# Altium PCB iceWerx_dev_carrier.PcbDoc (part 1 of 2)
Units mil, origin at the board's own origin, x right, y up, seen from the top; angles counter-clockwise.
Board outline 4750 x 3625 mil, 2 copper layers (Top Layer, Bottom Layer); 142 components, 162 nets, 603 pads, 259 vias.
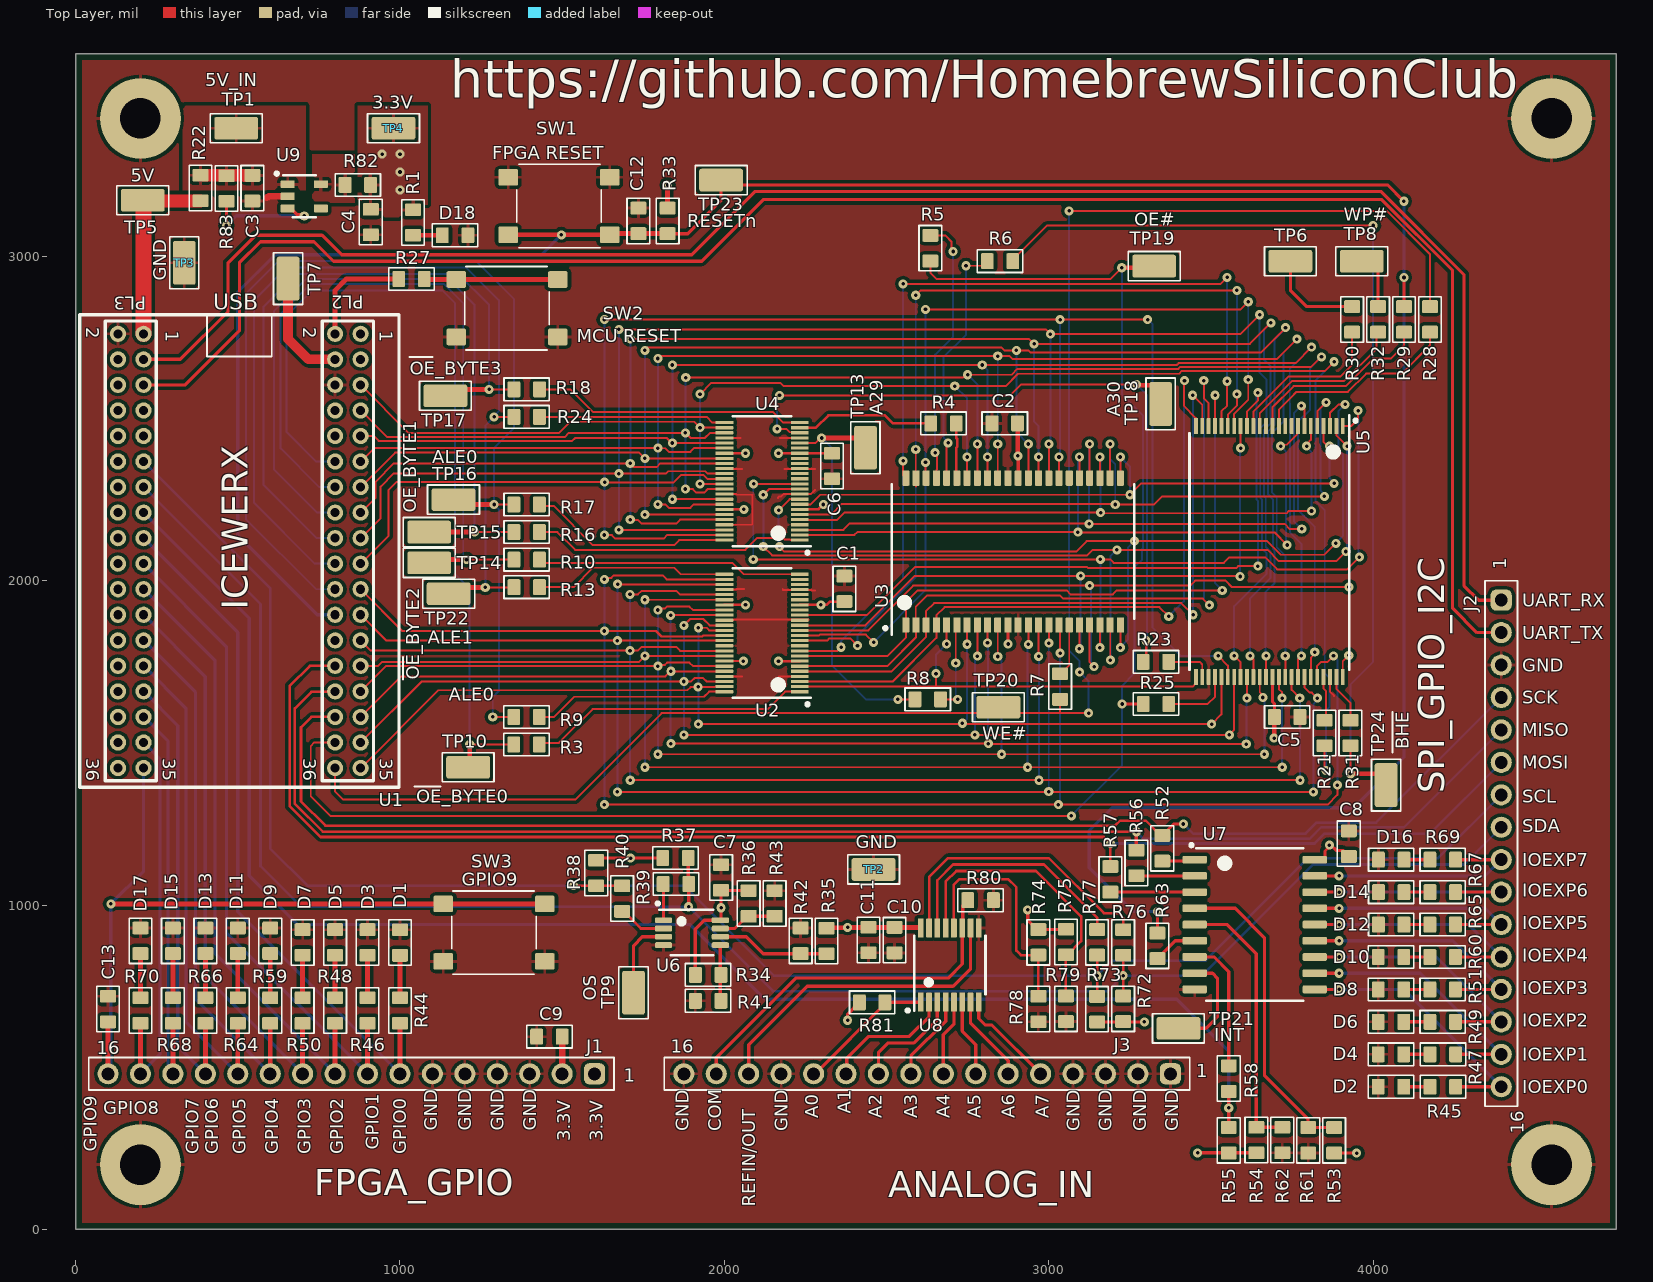
[diagram p0: Top Layer view]
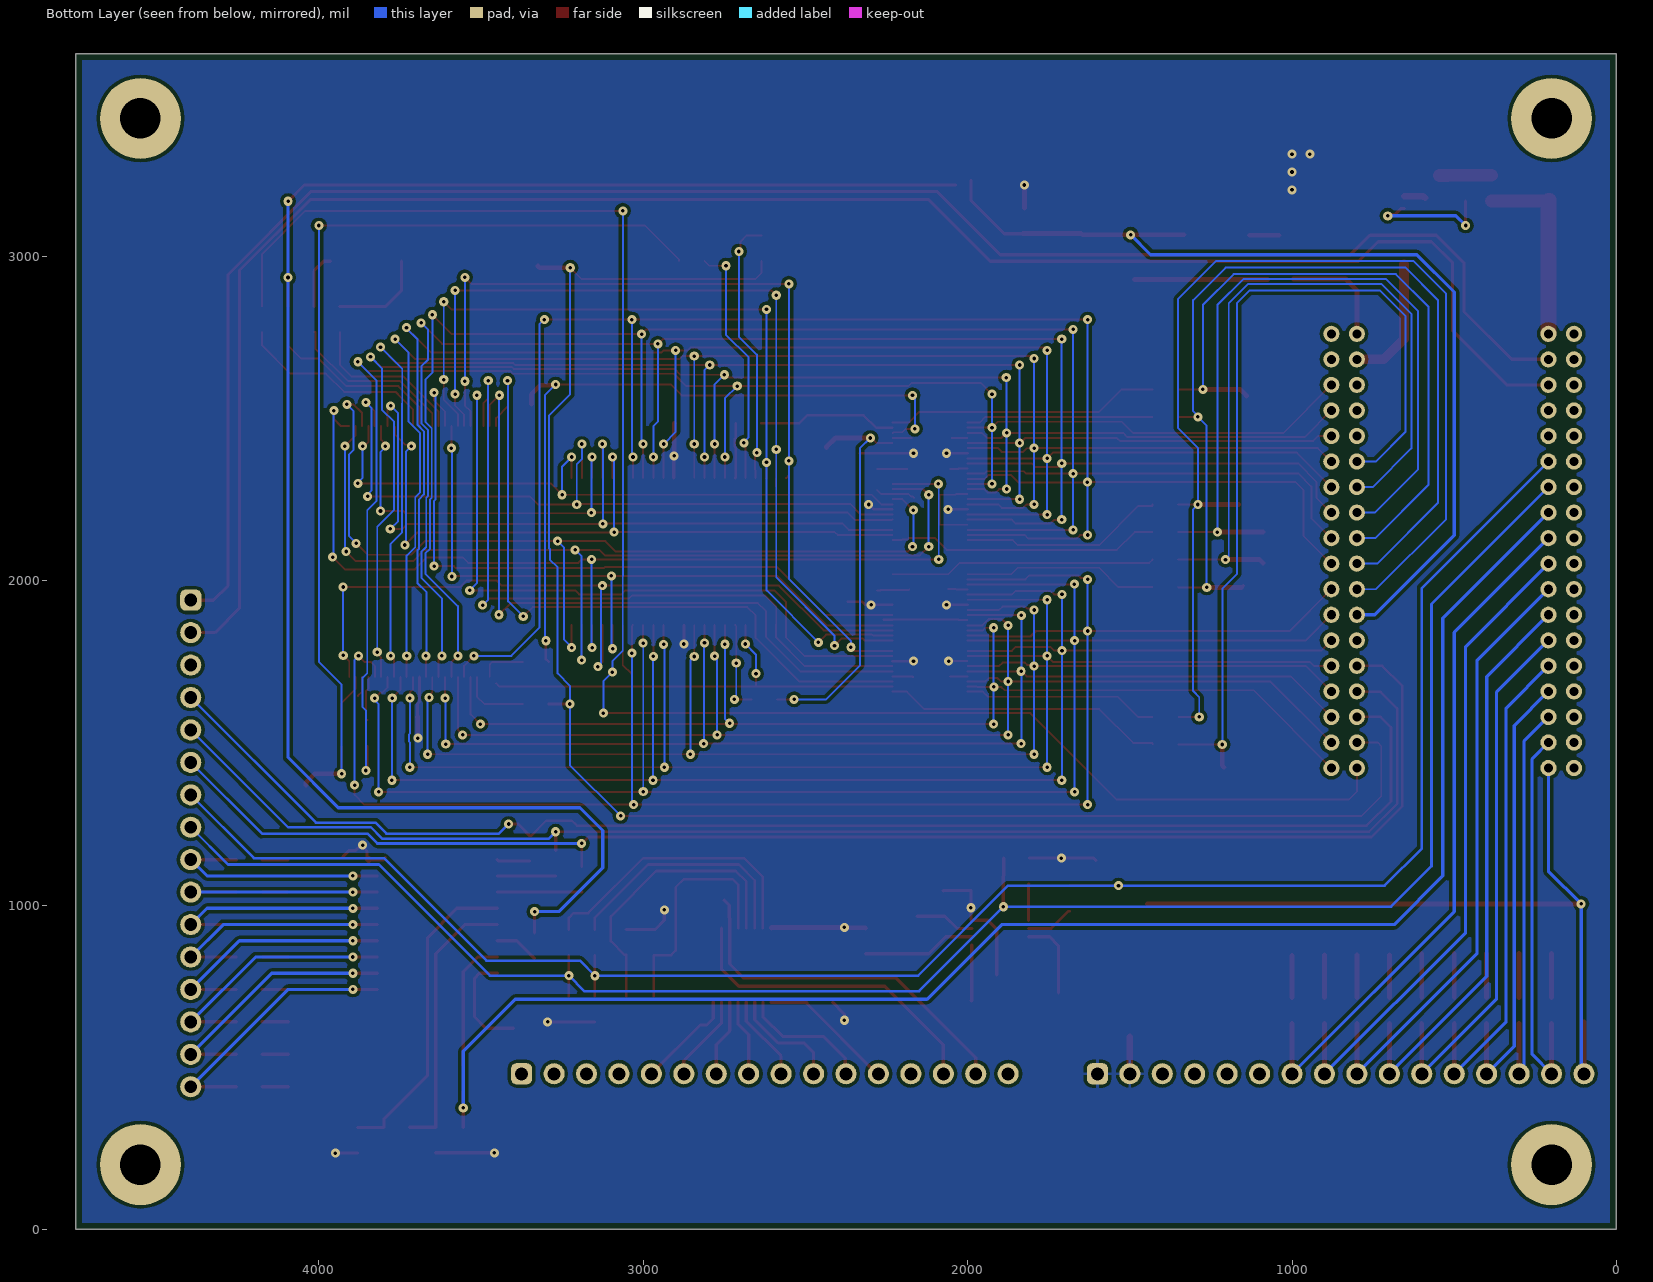
[diagram p1: Bottom Layer view, seen from below]

## Layer stack, top to bottom
Top Solder: solder mask 0.4, Solder Resist, Dk 3.5
Top Layer: signal copper 1.4
Dielectric 1: dielectric 12.6, FR-4, Dk 4.8
Bottom Layer: signal copper 1.4
Bottom Solder: solder mask 0.4, Solder Resist, Dk 3.5

## Board outline
0,0 0,3625 4750,3625 4750,0

## Design rules (kind name [scope] priority, off if disabled: settings)
AcuteAngle [All] p1: minimum=6.00000000000000E+0001 checktracksonly=FALSE
BoardOutlineClearance BoardOutlineClearance_SILK [OnLayer('Top Overlay')] p1: gap=20 ignorepadtopadclearanceinfootprint=FALSE except(0: Arc-SplitContinuation Track-SplitContinuation SMDPad-SplitContinuation THPad-SplitContinuation Via-SplitContinuation Fill-SplitContinuation Poly-SplitContinuation Region-SplitContinuation Text-SplitContinuation; 5: Arc-OutlineEdge Track-OutlineEdge Text-OutlineEdge)
BoardOutlineClearance [All] p2: gap=20 ignorepadtopadclearanceinfootprint=FALSE except(0: Arc-SplitContinuation Track-SplitContinuation SMDPad-SplitContinuation THPad-SplitContinuation Via-SplitContinuation Fill-SplitContinuation Poly-SplitContinuation Region-SplitContinuation Text-SplitContinuation)
Clearance [All] p1: gap=10 ignorepadtopadclearanceinfootprint=FALSE except(0: Arc-Hole Track-Hole SMDPad-Hole THPad-Hole Via-Hole Fill-Hole Poly-Hole Region-Hole Text-Hole; 5: SMDPad-SMDPad; 6: Arc-Arc Arc-Track Arc-SMDPad Track-Track Track-SMDPad)
HoleSize [All] p1: absolutevalues=TRUE maxlimit=250 minlimit=10 maxpercent=80.000 minpercent=20.000
HoleToHoleClearance [All] p1: gap=15 allowstackedmicrovias=TRUE
MinimumAnnularRing [All] p1: minimumring=8.5
MinimumSolderMaskSliver [All] p1: minsoldermaskwidth=3
PolygonConnect [All] p1: thpad.connectstyle=Relief thpad.reliefconductorwidth=10 thpad.reliefentries=4 thpad.polygonreliefangle="90 Angle" thpad.airgapwidth=10 smdpad.connectstyle=Relief smdpad.reliefconductorwidth=10 smdpad.reliefentries=4 smdpad.polygonreliefangle="90 Angle" smdpad.airgapwidth=10 via.connectstyle=Direct via.reliefconductorwidth=10 via.reliefentries=4 via.polygonreliefangle="90 Angle" via.airgapwidth=10
RoomDefinition peripherals [InComponentClass('peripherals')] p1: confinementstyle=ConfineIn formatcopy=TRUE lockcomponents=FALSE outline 27.66,417.5 27.66,595.99 52.5,595.99 52.5,761.87 152.5,761.87 152.5,972.5 1088.99,972.5 1088.99,1056.08 1557.5,1056.08 1557.5,1181.24 1766.87,1181.24 1766.87,1192.5 3222.5,1192.5 3222.5,1212.5 3302.5,1212.5 3302.5,1257.5 3877.5,1257.5 3877.5,1271.87 4332.5,1271.87 4332.5,2064.33 4481,2064.33 4481,279 3927.5,279 3927.5,192.5 3507.5,192.5 3507.5,417.5
RoomDefinition icewerks [InComponentClass('icewerks')] p2: confinementstyle=ConfineIn formatcopy=TRUE lockcomponents=FALSE outline -2.4,1348.5 -2.4,2895.25 114.72,2895.25 114.72,3230.28 337.5,3230.28 337.5,3293.13 402.5,3293.13 402.5,3452.5 1072.5,3452.5 1072.5,3296.08 1691.01,3296.08 1691.01,3292.5 2082.5,3292.5 2082.5,3107.5 2682.5,3107.5 2682.5,3042.5 4057.5,3042.5 4057.5,2888.21 4222.89,2888.21 4222.89,2723.21 4097.5,2723.21 4097.5,1277.5 2552.5,1277.5 2552.5,1052.5 2367.5,1052.5 2367.5,1348.5
RoutingVias [All] p1: holewidth=20 width=45 viastyle="Through Hole" minholewidth=10 minwidth=30 maxholewidth=100 maxwidth=200
SilkToSilkClearance [All] p1: silktosilkclearance=0
SilkToSolderMaskClearance [IsPad] p1: minsilkscreentomaskgap=0 clearancetoexposedcopper=TRUE
SolderMaskExpansion [All] p1: expansion=4
UnRoutedNet [All] p1: checkbadconnections=TRUE
Width [All] p1: maxlimit=100 minlimit=6 preferedwidth=15 minimp=50.000000 maximp=50.000000 favimp=50.000000
24 further rules are at their usual default settings.

## Classes and differential pairs
net class IO[15..0]: IO0 IO1 IO2 IO3 IO4 IO5 IO6 IO7 IO8 IO9 IO10 IO11 IO12 IO13 IO14 IO15
net class FPGA_GPIO[9..0]: FPGA_GPIO0 FPGA_GPIO1 FPGA_GPIO2 FPGA_GPIO3 FPGA_GPIO4 FPGA_GPIO5 FPGA_GPIO6 FPGA_GPIO7 FPGA_GPIO8 FPGA_GPIO9
net class A[31..0]: A0 A1 A2 A3 A4 A5 A6 A7 A8 A9 A10 A11 A12 A13 A14 A15 A16 A17 A18 A19 A20 A21 A22 A23 A24 A25 A26 A27 A28 A29 A30 A31
component class peripherals: C7 C8 C9 C10 C11 C13 D1 D2 D3 D4 D5 D6 D7 D8 D9 D10 D11 D12 D13 D14 D15 D16 D17 J1 J2 J3 R34 R35 R36 R37 R38 R39 R40 R41 R42 R43 R44 R45 R46 R47 R48 R49 R50 R51 R52 R53 R54 R55 R56 R57 R58 R59 R60 R61 R62 R63 R64 R65 R66 R67 R68 R69 R70 R72 R73 R74 R75 R76 R77 R78 R79 R80 R81 SW3 TP9 TP21 U6 U7 U8
component class icewerks: C1 C2 C3 C4 C5 C6 C12 D18 R1 R3 R4 R5 R6 R7 R8 R9 R10 R13 R16 R17 R18 R21 R22 R23 R24 R25 R27 R28 R29 R30 R31 R32 R33 R82 R83 SW1 SW2 TP1 TP2 TP3 TP4 TP5 TP6 TP7 TP8 TP10 TP13 TP14 TP15 TP16 TP17 TP18 TP19 TP20 TP22 TP23 TP24 U1 U2 U3 U4 U5 U9

## Components (designator, comment, footprint, x,y, rotation, side; value= is the part's Value field where it differs from the comment)
C1 "Cap_NP" 0805 2370,1975 r270 top
C2 "Cap_NP" 0805 2864.37,2485 r0 top
C3 "Cap_NP" 0805 545,3210 r90 top
C4 "Cap_NP" 0805 910,3105.63 r90 top
C5 "Cap_NP" 0805 3735,1580 r180 top
C6 "Cap_NP" 0805 2332,2353.76 r90 top
C7 "Cap_NP" 0805 1990,1085 r270 top
C8 "Cap_NP" 0805 3925,1189.37 r270 top
C9 "Cap_NP" 0805 1460.63,594.37 r0 top
C10 "Cap_NP" 0805 2524.54,891.89 r90 top
C11 "Cap_NP" 0805 2444.54,892.52 r90 top
C12 "Cap_NP" 0805 1735,3109.37 r270 top
C13 "Cap_NP" 0805 100,679.37 r270 top
D1 "LED" 0805 1000,884.37 r90 top
D2 "LED" 0805 4055,440 r180 top
D3 "LED" 0805 900,885 r90 top
D4 "LED" 0805 4055,540 r180 top
D5 "LED" 0805 800,885 r90 top
D6 "LED" 0805 4055,640 r180 top
D7 "LED" 0805 700,885 r90 top
D8 "LED" 0805 4055,740 r180 top
D9 "LED" 0805 600,890 r90 top
D10 "LED" 0805 4055,840 r180 top
D11 "LED" 0805 500,890 r90 top
D12 "LED" 0805 4055.63,940 r180 top
D13 "LED" 0805 400,890 r90 top
D14 "LED" 0805 4055.63,1040 r180 top
D15 "LED" 0805 300,890 r90 top
D16 "LED" 0805 4055.63,1140 r180 top
D17 "LED" 0805 200,890 r90 top
D18 "LED" 0805 1170,3065 r0 top
J1 "16X1 CONN" "0.100 16X1 HEADER" 850,480 r90 top
J2 "16X1 CONN" "0.100 16X1 HEADER" 4395,1190 r180 top
J3 "16X1 CONN" "0.100 16X1 HEADER" 2625,480 r90 top
R1 "Res" 0805 1040.13,3104.37 r90 top
R3 "Res" 0805 1390,1495 r0 top
R4 "Res" 0805 2675.63,2485 r180 top
R5 "Res" 0805 2635,3025 r270 top
R6 "Res" 0805 2850,2985 r0 top
R7 "Res" 0805 3035,1673.54 r270 top
R8 "Res" 0805 2626.99,1634.17 r180 top
R9 "Res" 0805 1390,1580 r0 top
R10 "Res" 0805 1390.63,2065 r0 top
R13 "Res" 0805 1390.63,1980 r0 top
R16 "Res" 0805 1390.63,2150 r0 top
R17 "Res" 0805 1390.63,2235 r0 top
R18 "Res" 0805 1390.63,2590 r0 top
R21 "Res" 0805 3850,1530.63 r90 top
R22 "Res" 0805 385,3210.63 r90 top
R23 "Res" 0805 3330.63,1750 r180 top
R24 "Res" 0805 1390.63,2505 r0 top
R25 "Res" 0805 3330.63,1620 r180 top
R27 "Res" 0805 1035.62,2930 r0 top
R28 "Res" 0805 4175.39,2805.71 r90 top
R29 "Res" 0805 4095.39,2805.71 r90 top
R30 "Res" 0805 3935.39,2805.71 r270 top
R31 "Res" 0805 3930,1530.63 r270 top
R32 "Res" 0805 4015.39,2805.71 r90 top
R33 "Res" 0805 1825,3109.37 r90 top
R34 "Res" 0805 1950,785 r0 top
R35 "Res" 0805 2315,889.37 r270 top
R36 "Res" 0805 2075,1005 r270 top
R37 "Res" 0805 1849.37,1145 r0 top
R38 "Res" 0805 1605,1098.74 r270 top
R39 "Res" 0805 1850.63,1065 r0 top
R40 "Res" 0805 1685,1020 r90 top
R41 "Res" 0805 1950,705 r180 top
R42 "Res" 0805 2235,890 r90 top
R43 "Res" 0805 2155,1005 r90 top
R44 "Res" 0805 1000,675 r270 top
R45 "Res" 0805 4215,440 r0 top
R46 "Res" 0805 900,675 r270 top
R47 "Res" 0805 4215,540 r0 top
R48 "Res" 0805 800,675 r270 top
R49 "Res" 0805 4214.37,640 r0 top
R50 "Res" 0805 700,675 r270 top
R51 "Res" 0805 4214.37,740 r0 top
R52 "Res" 0805 3350,1175 r90 top
R53 "Res" 0805 3880,275 r90 top
R54 "Res" 0805 3640,275.63 r90 top
R55 "Res" 0805 3555,275 r90 top
R56 "Res" 0805 3270,1130 r90 top
R57 "Res" 0805 3190,1079.37 r90 top
R58 "Res" 0805 3555,465 r270 top
R59 "Res" 0805 600,675 r270 top
R60 "Res" 0805 4214.37,840 r0 top
R61 "Res" 0805 3800,275 r270 top
R62 "Res" 0805 3720,275.63 r270 top
R63 "Res" 0805 3335,874.37 r90 top
R64 "Res" 0805 500,675 r270 top
R65 "Res" 0805 4214.37,940 r0 top
R66 "Res" 0805 400,675 r270 top
R67 "Res" 0805 4214.37,1040 r0 top
R68 "Res" 0805 300,675 r270 top
R69 "Res" 0805 4214.37,1140 r0 top
R70 "Res" 0805 200,675 r270 top
R72 "Res" 0805 3229.52,680.31 r90 top
R73 "Res" 0805 3148.98,679.06 r90 top
R74 "Res" 0805 2968.06,885.32 r270 top
R75 "Res" 0805 3053.06,885.94 r270 top
R76 "Res" 0805 3229.52,884.68 r270 top
R77 "Res" 0805 3148.98,885.32 r270 top
R78 "Res" 0805 2968.06,679.69 r270 top
R79 "Res" 0805 3053.06,680.32 r270 top
R80 "Res" 0805 2790,1015 r0 top
R81 "Res" 0805 2455.63,700 r0 top
R82 "Res" 0805 870,3220 r0 top
R83 "Res" 0805 465,3209.37 r90 top
SW1 "PUSHBUTTON SW" "PTS645SM43SMTR92 LFS" 1490,3155 r180 top
SW2 "PUSHBUTTON SW" "PTS645SM43SMTR92 LFS" 1330,2840 r0 top
SW3 "PUSHBUTTON SW" "PTS645SM43SMTR92 LFS" 1290,915 r0 top
TP1 "TP" KEYSTONE_5012 495,3395 r0 top
TP2 "TP" KEYSTONE_5012 2460,1110 r0 top
TP3 "TP" KEYSTONE_5012 335,2980 r270 top
TP4 "TP" KEYSTONE_5012 980,3395 r0 top
TP5 "TP" KEYSTONE_5012 207.22,3172.78 r180 top
TP6 "TP" KEYSTONE_5012 3745,2985 r0 top
TP7 "TP" KEYSTONE_5012 655,2931.43 r90 top
TP8 "TP" KEYSTONE_5012 3965,2985 r0 top
TP9 "TP" KEYSTONE_5012 1720,730 r90 top
TP10 "TP" KEYSTONE_5012 1210,1425 r180 top
TP13 "TP" KEYSTONE_5012 2435,2410 r270 top
TP14 "TP" KEYSTONE_5012 1090,2055 r180 top
TP15 "TP" KEYSTONE_5012 1090,2150 r180 top
TP16 "TP" KEYSTONE_5012 1165,2250 r180 top
TP17 "TP" KEYSTONE_5012 1140,2570 r0 top
TP18 "TP" KEYSTONE_5012 3345,2545 r270 top
TP19 "TP" KEYSTONE_5012 3325,2970 r180 top
TP20 "TP" KEYSTONE_5012 2845,1610 r180 top
TP21 "TP" KEYSTONE_5012 3400,620 r0 top
TP22 "TP" KEYSTONE_5012 1150,1960 r180 top
TP23 "TP" KEYSTONE_5012 1990,3235 r180 top
TP24 "TP" KEYSTONE_5012 4040,1370 r90 top
U1 "iCE40 HX8K" "iCE40 HX8K FPGA MODULE" 504.72,2091.85 r180 top locked
U2 "74LVC16373ADGVJ" "NEXPERIA TSSOP48 SOT480-1" 2116.14,1838.9 r180 top locked
U3 "CY62147GE30-45ZSXI" "CYPRESS Z44 44-TSOP II" 2890,2090 r90 top locked
U4 "74LVC16373ADGVJ" "NEXPERIA TSSOP48 SOT480-1" 2116.14,2306.38 r180 top locked
U5 "S29AL008J70TFI020" "CYPRRESS 48-TSOP" 3680,2090 r270 top locked
U6 "PCT2075DP,118" "NXP TSSOP-8 (SOT505-1)" 1900,915 r0 top
U7 "MCP23S08T-E/SO" "MICROCHIP 18-SOIC" 3635,940 r0 top locked
U8 "ADS7830IPWR" "TI PW0016A (16TSSOP)" 2695,815 r90 top
U9 "TLV73333PDBVR" "TI DBV0005A (SOT23-5)" 705,3185 r0 top

## Footprints (in the part's own frame and the unit in brackets; to place one, negate y for a bottom-side part, rotate by r counter-clockwise, add the part's x,y. Pads: shape width x height; smd on the part's side, far side on the other; paste and mask are expansions set on the pad)
"0.100 16X1 HEADER" [mil] "HEADER"
  rrect50% 65x65 hole 40: 1(0,-750)
  round 65 hole 40: 2(0,-650) 3(0,-550) 4(0,-450) 5(0,-350) 6(0,-250) 7(0,-150) 8(0,-50) 9(0,50) 10(0,150) 11(0,250) 12(0,350) 13(0,450) 14(0,550) 15(0,650) 16(0,750)
  silkscreen extent -50,-810 50,810, body extent -50,-810 50,810, height 335
0805 [mm]
  rrect20% 1x1.25 smd: 1(-1,0) 2(1,0)
  silkscreen extent -1.78,-0.89 1.78,0.89, body extent -1.4,-0.63 1,0.63, height 2
"CYPRESS Z44 44-TSOP II" [mm] "44-TSOP"
  rrect20% 1.2x0.55 smd mask+0.076: 1(-5.75,8.4) 2(-5.75,7.6) 3(-5.75,6.8) 4(-5.75,6) 5(-5.75,5.2) 6(-5.75,4.4) 7(-5.75,3.6) 8(-5.75,2.8) 9(-5.75,2) 10(-5.75,1.2) 11(-5.75,0.4) 12(-5.75,-0.4) 13(-5.75,-1.2) 14(-5.75,-2) 15(-5.75,-2.8) 16(-5.75,-3.6) 17(-5.75,-4.4) 18(-5.75,-5.2) 19(-5.75,-6) 20(-5.75,-6.8) 21(-5.75,-7.6) 22(-5.75,-8.4) 23(5.75,-8.4) 24(5.75,-7.6) 25(5.75,-6.8) 26(5.75,-6) 27(5.75,-5.2) 28(5.75,-4.4) 29(5.75,-3.6) 30(5.75,-2.8) 31(5.75,-2) 32(5.75,-1.2) 33(5.75,-0.4) 34(5.75,0.4) 35(5.75,1.2) 36(5.75,2) 37(5.75,2.8) 38(5.75,3.6) 39(5.75,4.4) 40(5.75,5.2) 41(5.75,6) 42(5.75,6.8) 43(5.75,7.6) 44(5.75,8.4)
  silkscreen extent -6.5,-9.5 5.25,10.12, body extent -5.92,-9.25 5.92,9.25, height 1.19
"CYPRRESS 48-TSOP" [mm] "48-TSOP"
  rrect20% 1.25x0.3 smd mask+0.05: 1(-9.825,5.75) 2(-9.825,5.25) 3(-9.825,4.75) 4(-9.825,4.25) 5(-9.825,3.75) 6(-9.825,3.25) 7(-9.825,2.75) 8(-9.825,2.25) 9(-9.825,1.75) 10(-9.825,1.25) 11(-9.825,0.75) 12(-9.825,0.25) 13(-9.825,-0.25) 14(-9.825,-0.75) 15(-9.825,-1.25) 16(-9.825,-1.75) 17(-9.825,-2.25) 18(-9.825,-2.75) 19(-9.825,-3.25) 20(-9.825,-3.75) 21(-9.825,-4.25) 22(-9.825,-4.75) 23(-9.825,-5.25) 24(-9.825,-5.75) 25(9.825,-5.75) 26(9.825,-5.25) 27(9.825,-4.75) 28(9.825,-4.25) 29(9.825,-3.75) 30(9.825,-3.25) 31(9.825,-2.75) 32(9.825,-2.25) 33(9.825,-1.75) 34(9.825,-1.25) 35(9.825,-0.75) 36(9.825,-0.25) 37(9.825,0.25) 38(9.825,0.75) 39(9.825,1.25) 40(9.825,1.75) 41(9.825,2.25) 42(9.825,2.75) 43(9.825,3.25) 44(9.825,3.75) 45(9.825,4.25) 46(9.825,4.75) 47(9.825,5.25) 48(9.825,5.75)
  silkscreen extent -10.68,-6.25 9.25,6.88, body extent -10,-6 10,6, height 1.2
"iCE40 HX8K FPGA MODULE" [mm] "iCE40 HX8K FPGA MODULE"
  round 1.27 hole 0.711: PL2_1(-9.5,-17) PL2_2(-7.5,-17) PL2_3(-9.5,-15) PL2_4(-7.5,-15) PL2_5(-9.5,-13) PL2_6(-7.5,-13) PL2_7(-9.5,-11) PL2_8(-7.5,-11) PL2_9(-9.5,-9) PL2_10(-7.5,-9) PL2_11(-9.5,-7) PL2_12(-7.5,-7) PL2_13(-9.5,-5) PL2_14(-7.5,-5) PL2_15(-9.5,-3) PL2_16(-7.5,-3) PL2_17(-9.5,-1) PL2_18(-7.5,-1) PL2_19(-9.5,1) PL2_20(-7.5,1) PL2_21(-9.5,3) PL2_22(-7.5,3) PL2_23(-9.5,5) PL2_24(-7.5,5) PL2_25(-9.5,7) PL2_26(-7.5,7) PL2_27(-9.5,9) PL2_28(-7.5,9) PL2_29(-9.5,11) PL2_30(-7.5,11) PL2_31(-9.5,13) PL2_32(-7.5,13) PL2_33(-9.5,15) PL2_34(-7.5,15) PL2_35(-9.5,17) PL2_36(-7.5,17) PL3_1(7.5,-17) PL3_2(9.5,-17) PL3_3(7.5,-15) PL3_4(9.5,-15) PL3_5(7.5,-13) PL3_6(9.5,-13) PL3_7(7.5,-11) PL3_8(9.5,-11) PL3_9(7.5,-9) PL3_10(9.5,-9) PL3_11(7.5,-7) PL3_12(9.5,-7) PL3_13(7.5,-5) PL3_14(9.5,-5) PL3_15(7.5,-3) PL3_16(9.5,-3) PL3_17(7.5,-1) PL3_18(9.5,-1) PL3_19(7.5,1) PL3_20(9.5,1) PL3_21(7.5,3) PL3_22(9.5,3) PL3_23(7.5,5) PL3_24(9.5,5) PL3_25(7.5,7) PL3_26(9.5,7) PL3_27(7.5,9) PL3_28(9.5,9) PL3_29(7.5,11) PL3_30(9.5,11) PL3_31(7.5,13) PL3_32(9.5,13) PL3_33(7.5,15) PL3_34(9.5,15) PL3_35(7.5,17) PL3_36(9.5,17)
  silkscreen extent -12.5,-18.5 12.5,18.5, body extent -10.5,-18.15 10.5,18.15, height 6.35
KEYSTONE_5012 [mm] "TEST POINT PC"
  rrect20% 3.43x1.78 smd: 1(0,0)
  silkscreen extent -2.03,-1.14 2.03,1.14, body extent -1.28,-0.52 1.28,0.48, height 1.5
"MICROCHIP 18-SOIC" [mm] "SOIC, 18-Leads, Body 11.55x7.50mm, Pitch 1.27mm, IPC Medium Density"
  rrect30% 1.9x0.6 smd: 1(-4.7,5.08) 2(-4.7,3.81) 3(-4.7,2.54) 4(-4.7,1.27) 5(-4.7,0) 6(-4.7,-1.27) 7(-4.7,-2.54) 8(-4.7,-3.81) 9(-4.7,-5.08) 10(4.7,-5.08) 11(4.7,-3.81) 12(4.7,-2.54) 13(4.7,-1.27) 14(4.7,0) 15(4.7,1.27) 16(4.7,2.54) 17(4.7,3.81) 18(4.7,5.08)
  silkscreen extent -5.08,-5.97 3.81,6.35, body extent -5.15,-5.8 5.15,5.8, height 2.65
"NEXPERIA TSSOP48 SOT480-1" [mm] "TSSOP48"
  rrect20% 1.4x0.246 smd mask+0.025: 1(-2.95,4.6) 2(-2.95,4.2) 3(-2.95,3.8) 4(-2.95,3.4) 5(-2.95,3) 6(-2.95,2.6) 7(-2.95,2.2) 8(-2.95,1.8) 9(-2.95,1.4) 10(-2.95,1) 11(-2.95,0.6) 12(-2.95,0.2) 13(-2.95,-0.2) 14(-2.95,-0.6) 15(-2.95,-1) 16(-2.95,-1.4) 17(-2.95,-1.8) 18(-2.95,-2.2) 19(-2.95,-2.6) 20(-2.95,-3) 21(-2.95,-3.4) 22(-2.95,-3.8) 23(-2.95,-4.2) 24(-2.95,-4.6) 25(2.95,-4.6) 26(2.95,-4.2) 27(2.95,-3.8) 28(2.95,-3.4) 29(2.95,-3) 30(2.95,-2.6) 31(2.95,-2.2) 32(2.95,-1.8) 33(2.95,-1.4) 34(2.95,-1) 35(2.95,-0.6) 36(2.95,-0.2) 37(2.95,0.2) 38(2.95,0.6) 39(2.95,1) 40(2.95,1.4) 41(2.95,1.8) 42(2.95,2.2) 43(2.95,2.6) 44(2.95,3) 45(2.95,3.4) 46(2.95,3.8) 47(2.95,4.2) 48(2.95,4.6)
  silkscreen extent -3.81,-5.08 2.29,5.71, body extent -3.2,-4.9 3.2,4.9, height 1.1
"NXP TSSOP-8 (SOT505-1)" [mm]
  rrect50% 1.35x0.45 smd mask+0.05: 1(-2.225,0.975) 2(-2.225,0.325) 3(-2.225,-0.325) 4(-2.225,-0.975) 5(2.225,-0.975) 6(2.225,-0.325) 7(2.225,0.325) 8(2.225,0.975)
  silkscreen extent -2.79,-1.78 1.65,2.41, body extent -2.45,-1.55 2.45,1.55, height 1.1
"PTS645SM43SMTR92 LFS" [mm] "Tactile Switch SPST-NO Top Actuated Surface Mount"
  rrect20% 1.55x1.3 smd: 1(-3.975,2.25) 2(3.975,2.25) 3(-3.975,-2.25) 4(3.975,-2.25)
  silkscreen extent -3.3,-3.27 3.3,3.27, body extent -4.51,-3.01 4.49,2.99, height 4.3
"TI DBV0005A (SOT23-5)" [mm]
  rrect20% 1.1x0.6 smd: 1(-1.3,0.95) 2(-1.3,0) 3(-1.3,-0.95) 4(1.3,-0.95) 5(1.3,0.95)
  silkscreen extent -2.28,-1.65 0.89,1.9, body extent -1.5,-1.53 1.5,1.53, height 1.1
"TI PW0016A (16TSSOP)" [mm] "16-TSSOP"
  rrect25% 1.5x0.45 smd mask+0.05: 1(-2.9,2.275) 2(-2.9,1.625) 3(-2.9,0.975) 4(-2.9,0.325) 5(-2.9,-0.325) 6(-2.9,-0.975) 7(-2.9,-1.625) 8(-2.9,-2.275) 9(2.9,-2.275) 10(2.9,-1.625) 11(2.9,-0.975) 12(2.9,-0.325) 13(2.9,0.325) 14(2.9,0.975) 15(2.9,1.625) 16(2.9,2.275)
  silkscreen extent -3.68,-2.79 2.29,3.43, body extent -3.2,-2.55 3.2,2.55, height 1.2

## Part data
C1 C2 C5 C6 C7 C8 C9 C11 C12 C13: "Capacitor", Capacitance=0.1uF, Manufacturer=KEMET, Manufacturer PN=C0805C104M4VACTU, Voltage=16V
C3 C4 C10: "Capacitor", Capacitance=1uF, Manufacturer="Taiyo Yuden", Manufacturer PN=EMK212BJ105MD-T, Voltage=16V
D1 D2 D4 D6 D7 D8 D13 D18: Color=GREEN, Manufacturer=Lite-On, Manufacturer PN=LTST-C171KGKT, Vf=2V
D3 D9 D14 D15 D16: Color=YELLOW, Manufacturer=Lite-On, Manufacturer PN=LTST-C171KSKT, Vf=2V
D5 D10 D11 D12 D17: Color=RED, Manufacturer=Lite-On, Manufacturer PN=LTST-C171KRKT, Vf=2V
J1 J2 J3: Manufacturer=Sullins, Manufacturer PN=PPTC161LFBN-RC
R1 R37 R38 R44 R45 R46 R47 R48 R49 R50 R51 R59 R60 R64 R65 R66 R67 R68 R69 R70 R72 R73: "Resistor", Manufacturer="Stackpole Electronics Inc", Manufacturer PN=RMCF0805JT1K00, Power Rating=1/8W, Resistance=1k, Tolerance=5%
R3 R4 R5 R6 R7 R8 R9 R10 R13 R16 R17 R18 R21 R22 R23 R24 R25 R27 R28 R29 R30 R31 R32 R34 R35 R36 R39 R40 R41 R42 R43 R52 R53 R54 R56 R57 R58 R61 R62 R63 R74 R75 R76 R77 R78 R79 R80 R81 R82 R83: "Resistor", Manufacturer="Stackpole Electronics Inc", Manufacturer PN=RMCF0805ZT0R00, Power Rating=1/10W, Resistance=0, Tolerance=Jumper
R33: "Resistor", Manufacturer="Stackpole Electronics Inc", Manufacturer PN=RMCF0805JT10K0, Power Rating=1/8W, Resistance=10k, Tolerance=5%
R55: "Resistor", Manufacturer="Stackpole Electronics Inc", Manufacturer PN=RMCF0805JT10K0, Power Rating=1/8W, Resistance=10K, Tolerance=5%
SW1 SW2 SW3: library part SWITCH_PB, Manufacturer=C&K, Manufacturer PN="PTS645SM43SMTR92 LFS"
TP1 TP2 TP3 TP4 TP5 TP6 TP7 TP8 TP9 TP10 TP13 TP14 TP15 TP16 TP17 TP18 TP19 TP20 TP21 TP22 TP23 TP24: Manufacturer=Keystone, Manufacturer PN=5015
U1: library part "iCE40 HX8K FPGA MODULE", Manufacturer=Samtec, Manufacturer PN=SQW-118-01-L-D
U2 U4: "D-Type Transparent Latch 2 Channel 8:8 IC Tri-State 48-TSSOP", Manufacturer=Nexperia, Manufacturer PN=74LVC16373ADGVJ
U3: "SRAM - Asynchronous Memory IC 4Mb (256K x 16) Parallel 45ns 44-TSOP II", Manufacturer=Cypress, Manufacturer PN=CY62147GE30-45ZSXI
U5: "FLASH - NOR Memory IC 8Mb (1M x 8, 512K x 16) Parallel  70ns 48-TSOP", Manufacturer=Cypress, Manufacturer PN=S29AL008J70TFI020
U6: "Temperature Sensor Digital, Local -55亱C ~ 125亱C 11 b 8-TSSOP", Manufacturer=NXP, Manufacturer PN=PCT2075DP,118
U7: Manufacturer=Microchip, Manufacturer PN=MCP23S08T-E/SO
U8 U9: Manufacturer="Texas Instruments"
  U8: Manufacturer PN=ADS7830IPWR
  U9: Manufacturer PN=TLV73333PDBVR

## Free pads (board coordinates)
  round 250 hole 125: MH(200,200) MH(200,3425) MH(4550,200) MH(4550,3425)

## Via types
v1: diameter 28, hole 11, Top Layer to Bottom Layer, tented top, 259 vias

## Nets (pads, with @x,y where several pads share a name; then routed paths per layer and width w, separated by ;. In a path a pad name is that pad's centre, name@x,y a point inside that pad or via, vN(x,y) a via of type N, cw(c..) or ccw(c..) an arc to the next point about the centre after c; other vN are vias at no path point)
3V3: C1.2 C2.2 C4.2 C5.2 C6.2 C7.2 C8.2 C9.2 C10.2 C11.2 J1.1 J1.2 R1.2 R33.2 R34.1 R35.1 R36.1 R37.1 R38.1 R53.1 R54.1 R55.1 R72.1 R73.1 R74.1 R75.1 R81.1 R82.2 TP4.1 U2.7 U2.18 U2.31 U2.42 U3.11 U3.33 U4.7 U4.18 U4.31 U4.42 U5.37 U6.8 U7.18 U8.16 | length 3025.5
  Top Layer w6: U2.42@2000,1752.28 v1(2058.54,1752.28)
  Top Layer w8: U2.31@2000,1925.51 v1(2065.28,1925.51) ; U4.31@2000,2392.99 v1(2065.28,2392.99) ; U4.42@2000.12,2219.88 2059.88,2219.88 v1(2060,2220) ; v1(2167.01,1752.28) U2.7@2232.28,1752.28 ; v1(2167.01,2392.99) U4.18@2232.28,2392.99 C6.2@2332,2393.13 ; U2.18@2232.28,1925.51 v1(2297.56,1925.51) 2315.51,1925.51 2325.63,1935.63 C1.2@2370,1935.63 ; U4.7@2232.28,2219.76 2233.03,2220.51 2290.51,2220.51 v1(2305,2235)
  Top Layer w10: R38.1@1605,1138.11 1611.89,1145 v1(1710.94,1145) R37.1@1810,1145 ; R34.1@1910.63,785 1910.63,925.63 1938.39,953.39 U6.8@1987.6,953.39 1990,955.79 v1(1990,991.75) C7.2@1990,1045.63 1990.63,1045 2074.37,1045 R36.1@2075,1044.37 ; v1(2380,645) 2380,663.74 R81.1@2416.26,700 ; U3.11@2874.25,1863.62 2874.25,1805.75 v1(2875,1805) ; v1(2905,2385) 2905.75,2384.25 U3.33@2905.75,2316.38 ; v1(2935,985) 2935,952.83 2963.14,924.69 R74.1@2968.06,924.69 R75.1@3053.06,924.69 ; R73.1@3148.98,639.69 3295,639.69 v1(3295,639.84) v1@3295,640 ; v1(3458.74,236.26) R54.1@3640,236.26 ; U5.37@3689.84,1703.19 3689.84,1626.86 3695.63,1621.07 C5.2@3695.63,1580 ; U7.18@3795,1146.81 3801.81,1140 U7.18@3820.04,1140 3844.87,1140 3851.68,1146.81 3851.68,1166.81 3865,1180.13 v1(3865,1185) 3869.87,1185 3886.34,1168.53 3906.47,1168.53 C8.2@3925,1150 ; R53.1@3880,235.63 v1(3949.37,235.63)
  Top Layer w15: R33.2@1825,3148.74 v1(1825,3220) ; R35.1@2315,928.74 2316.26,930 2378.74,930 v1(2380,931.26) C10.2@2524.54,931.26 2604.07,931.26 2605.43,929.9 U8.16@2605.43,929.17 ; C2.2@2903.74,2485 2904.37,2484.37 2904.37,2385.63 v1(2905,2385) ; v1(3695,1515) 3695.31,1515.31 3695.31,1579.68 C5.2@3695.63,1580
  Top Layer w20: J1.2@1500,480 C9.2@1500,594.37 ; U7.18@3845.63,1140 U7.18@3847.44,1141.81
  other v1: 1000,3205 1000,3260 945,3315 1000,3315
3V3_ICE: TP7.1 U1.PL2_4 | length 400.9
  Top Layer w30: TP7.1@655,2975 655,2745 717.6,2682.4 U1.PL2_4@800,2682.4
A0: U2.2 U3.5 U5.25 | length 1429
  Top Layer w6: U2.2@2232.28,1673.54 2652.54,1673.54 ; v1(2652.54,1713.54) 2652.54,1673.54 ; v1(2685,1805) 2685.14,1805.14 2685.14,1863.48 U3.5@2685.28,1863.62 ; U5.25@3453.62,1683.19 3443.98,1673.54 2652.54,1673.54
  Bottom Layer w6: v1(2652.54,1713.54) 2652.54,1772.54 v1(2685,1805)
A1: U2.3 U3.4 U5.24 | length 2189.2
  Top Layer w6: U2.3@2232.28,1689.29 2519.29,1689.29 2653.78,1823.78 U3.4@2653.78,1863.62 2653.78,1893.78 2678.93,1918.93 3341.07,1918.93 v1(3370,1890) ; v1(3418.62,2616.81) 3416.31,2614.5 3416.31,2538.73 3453.62,2501.42 U5.24@3453.62,2476.81
  Bottom Layer w6: v1(3370,1890) 3416.31,1936.31 3416.31,2614.5 v1(3418.62,2616.81)
A2: U2.5 U3.3 U5.23 | length 2146.3
  Top Layer w6: U2.5@2232.28,1720.79 2515.79,1720.79 2622.28,1827.28 U3.3@2622.28,1863.62 2622.28,1906.83 2646.52,1931.06 3408.94,1931.06 v1(3445,1895) ; v1(3443.31,2571.81) 3473.31,2541.81 U5.23@3473.31,2476.81
  Bottom Layer w6: v1(3443.31,2571.81) 3445,2570.12 v1(3445,1895)
A3: U2.6 U3.2 U5.22 | length 2267.1
  Top Layer w6: U2.6@2232.28,1736.54 2501.54,1736.54 2590.79,1825.79 U3.2@2590.79,1863.62 2590,1864.41 2590,1920.2 2624.8,1955 3034.42,1955 3044.42,1945 3475,1945 v1(3495,1925) ; v1(3477.99,2616.81) 3477.99,2562.01 3492.99,2547.01 U5.22@3492.99,2476.81
  Bottom Layer w6: v1(3477.99,2616.81) 3477.99,1942.01 v1(3495,1925)
A4: U2.8 U3.1 U5.21 | length 2166
  Top Layer w6: U2.8@2232.28,1768.03 2503,1768 2559.29,1824.29 U3.1@2559.29,1863.62 2559.29,1932.92 2596.37,1970 3055,1970 3067,1958 3198,1958 3210,1970 v1(3535,1970) ; U5.21@3512.68,2476.81 v1(3512.68,2571.81)
  Bottom Layer w6: v1(3512.68,2571.81) 3512.68,1992.32 v1(3535,1970)
A5: U2.9 U3.44 U5.20 | length 2861
  Top Layer w6: U2.9@2232.28,1783.78 2348.78,1783.78 v1(2360,1795) ; v1(2550.89,2369.58) 2550.89,2324.78 U3.44@2559.29,2316.38 ; v1(2550.89,2915) 3530,2915 v1(3550,2935) ; U5.20@3532.36,2476.81 3532.36,2522.36 3550,2540 v1(3550,2615)
  Bottom Layer w6: v1(2360,1795) 2360,1815 2550.89,2005.89 v1(2550.89,2369.58) v1(2550.89,2915) ; v1(3550,2615) v1(3550,2935)
A6: U2.11 U3.43 U5.19 | length 2913.1
  Top Layer w6: U2.11@2232.28,1815.28 2317.09,1815.28 2323.82,1822 2388.43,1822 v1(2410.43,1800) ; v1(2590,2405) 2590,2289.76 2590.79,2289.76 U3.43@2590.79,2316.38 ; v1(2590,2880) 2605,2895 v1(3580,2895) ; U5.19@3552.05,2476.81 3552.05,2512.05 3580,2540 v1(3580,2575)
  Bottom Layer w6: v1(2410.43,1800) 2410.43,1830.43 2590,2010 v1(2590,2405) v1(2590,2880) ; v1(3580,2575) v1(3580,2895)
A7: U2.12 U3.42 U5.18 | length 2791.6
  Top Layer w6: U2.12@2232.28,1831.02 2291.02,1831.02 2294,1834 2436,1834 v1(2460,1810) ; v1(2620,2365) 2620,2314.09 U3.42@2622.28,2316.38 ; v1(2620,2836.51) 3591.51,2836.51 v1(3615,2860) ; U5.18@3571.73,2476.81 3571.73,2514.76 3615,2558.03 v1(3615,2620)
  Bottom Layer w6: v1(2460,1810) 2620,1970 v1(2620,2365) v1(2620,2836.51) ; v1(3615,2620) v1(3615,2860)
A8: U3.27 U4.2 U5.8 | length 2228
  Top Layer w6: U4.2@2232.28,2141.02 2401.02,2141.02 2410,2150 v1(3090,2150) 3092,2148 3251.83,2148 3252.83,2149 3696,2149 v1(3735,2110) ; U3.27@3094.72,2316.38 v1(3094.72,2381.38) ; v1(3715,2415) 3719.21,2419.21 3733.84,2419.21 3765.68,2451.04 3765.68,2473.91 U5.8@3768.58,2476.81
  Bottom Layer w6: v1(3090,2150) 3090,2376.65 v1(3094.72,2381.38) ; v1(3715,2415) 3731,2399 3731,2114 v1(3735,2110)
A9: U3.26 U4.3 U5.7 | length 2379.6
  Top Layer w6: U4.3@2232.28,2156.77 2366.77,2156.77 2387,2177 3122.64,2177 v1(3124.64,2175) 3727.11,2175 3742.11,2160 v1(3780,2160) ; U3.26@3126.22,2316.38 v1(3126.22,2421.38) ; v1(3778.86,2538.96) 3788.27,2529.55 U5.7@3788.27,2476.81
  Bottom Layer w6: v1(3124.64,2175) 3124.64,2419.8 v1(3126.22,2421.38) ; v1(3778.86,2538.96) 3756,2516.1 3756,2184 v1(3780,2160)
A10: U3.25 U4.5 U5.6 | length 2113.5
  Top Layer w6: U4.5@2232.28,2188.27 2234.03,2186.52 2346.52,2186.52 2370,2210 v1(3160,2210) 3162,2208 3733.37,2208 3740.37,2215 v1(3810,2215) ; U3.25@3157.72,2316.38 v1(3157.72,2381.38) ; U5.6@3807.95,2476.81 3807.95,2433.91 v1@3798.51,2424.47 ; v1@3798.51,2424.47 3798.51,2418.51 v1(3795,2415) 3795,2420.95 v1@3798.51,2424.47
  Bottom Layer w6: v1(3157.72,2381.38) 3160,2379.09 v1(3160,2210) ; v1(3795,2415) 3795,2412.47 3810,2397.47 v1(3810,2215)
A11: U3.24 U4.6 U5.5 | length 2327
  Top Layer w6: U4.6@2232.28,2204.02 2329.02,2204.02 2362,2237 3203,2237 v1(3205,2235) 3325,2235 3350,2260 v1(3850,2260) ; U3.24@3189.21,2316.38 v1(3189.21,2421.38) ; U5.5@3827.64,2476.81 3828.82,2477.99 3828.82,2523.82 v1(3855,2550)
  Bottom Layer w6: v1(3189.21,2421.38) 3189.21,2374.69 3205,2358.9 v1(3205,2235) ; v1(3850,2260) 3850,2265.95 3838,2277.95 3838,2533 v1(3855,2550)
A12: U3.23 U4.8 U5.4 | length 2055.9
  Top Layer w6: U4.8@2232.28,2235.51 2266.2,2235.51 2295.68,2265 v1(3250,2265) 3285,2300 v1(3880,2300) ; U3.23@3220.71,2316.38 v1(3220.71,2381.38) ; U5.4@3847.32,2476.81 3847.32,2426.81 3859.13,2415 v1(3865,2415)
  Bottom Layer w6: v1(3220.71,2381.38) 3250,2352.09 v1(3250,2265) ; v1@3865,2409.13 3865,2317.53 3880,2302.53 v1(3880,2300)
A13: U3.22 U4.9 U5.3 | length 2924.9
  Top Layer w6: v1(2167.3,2217.7) 2200.87,2251.26 U4.9@2232.28,2251.26 ; v1(2170,2105) 2185,2090 3085,2090 3117,2122 v1(3264.02,2122) 3673,2122 3715,2080 3850,2080 v1(3885,2115) ; v1(3220.71,1793.62) U3.22@3220.71,1863.62 ; U5.3@3867.01,2476.81 3867.01,2517.01 3893.49,2543.49 v1(3913.49,2543.49)
  Bottom Layer w6: v1(2167.3,2217.7) 2167.3,2107.7 v1(2170,2105) ; v1(3220.71,1793.62) 3220.71,1795.04 3245,1819.33 3245,2102.98 v1(3264.02,2122) ; v1(3885,2115) 3907,2137 3907,2389.82 3893,2403.82 3893,2523 v1(3913.49,2543.49)
A14: U3.21 U4.11 U5.2 | length 2974.1
  Top Layer w6: v1(2120,2105) 2147,2078 3118,2078 3135,2095 v1(3210,2095) 3674.56,2095 3708.9,2060.67 3886.89,2060.67 v1(3916.22,2090) ; v1(2120,2265) 2137.76,2282.76 U4.11@2232.28,2282.76 ; U3.21@3189.21,1863.62 3189.61,1863.23 3189.61,1755.39 v1(3190,1755) ; U5.2@3886.69,2476.81 3886.69,2448.31 v1(3920,2415)
  Bottom Layer w6: v1(2120,2105) v1(2120,2265) ; v1(3190,1755) 3190,2075 v1(3210,2095) ; v1@3920,2095 3919,2096 3919,2414 v1(3920,2415)
A15: U3.20 U4.12 U5.1 | length 3168.1
  Top Layer w6: v1(2089,2066) 2089.12,2065.88 3159.12,2065.88 v1(3159.25,2065.75) 3189.25,2065.75 3200,2055 3540,2055 3556.96,2071.96 3666.92,2071.96 3703.88,2035 3920,2035 v1(3957.5,2072.5) ; v1@2089,2297.5 v1(2090,2298.5) U4.12@2232.28,2298.5 ; v1(3157.72,1793.62) U3.20@3157.72,1863.62 ; U5.1@3906.38,2476.81 3931.81,2476.81 3953.75,2498.75 v1(3953.75,2524.44)
  Bottom Layer w6: v1(2089,2066) v1@2089,2297.5 ; v1(3157.72,1793.62) 3159.25,1795.16 v1(3159.25,2065.75) ; v1(3953.75,2524.44) 3955,2523.19 3955,2075 v1(3957.5,2072.5) v1@3960,2070
A16: U2.13 U3.19 U5.48 | length 2631.3
  Top Layer w6: U2.13@2232.28,1846.77 2443.74,1846.77 2581.97,1985 v1(3126.22,1985) 3436.05,1985 3451.05,2000 3545,2000 3565,1980 3924.96,1980 v1(3925.51,1980.55) v1@3926.06,1981.11 ; U3.19@3126.22,1863.62 3126.22,1748.78 v1(3140,1735) ; U5.48@3906.38,1703.19 3906.38,1751.38 v1(3925,1770)
  Bottom Layer w6: v1(3126.22,1985) 3130.72,1980.5 3130.72,1744.28 v1(3140,1735) ; 3925,1960 v1(3925,1770) 3925.26,1770.26 3925.26,1980.3 v1(3925.51,1980.55)
A17: U2.14 U3.18 U5.17 | length 2186.2
  Top Layer w6: U2.14@2232.28,1862.52 2434.49,1862.52 2586.97,2015 v1(3098.39,2015) 3587.91,2015 v1(3590,2012.91) ; U3.18@3094.72,1863.62 v1(3094.72,1790.28) v1@3095,1790 ; v1(3591.42,2408.58) U5.17@3591.42,2476.81
  Bottom Layer w6: v1(3094.72,1790.28) 3098.39,1793.94 v1(3098.39,2015) ; v1(3590,2012.91) 3590,2407.16 v1(3591.42,2408.58)
A18: U2.16 U5.16 | length 2134.3
  Top Layer w6: U2.16@2232.28,1894.02 2439.02,1894.02 2587,2042 3118,2042 3121.25,2038.75 3577.65,2038.75 3583.86,2044.96 v1(3644.96,2044.96) ; U5.16@3611.1,2476.81 3611.1,2521.1 3645,2555 v1(3645,2580)
  Bottom Layer w6: v1(3644.96,2044.96) 3644.96,2246.01 3640,2250.97 3640,2569.05 3645,2574.05 v1(3645,2580)
A19: U2.17
A20: U2.19
A21: U2.20
A22: U2.22
A23: U2.23
A24: U4.13
A25: U4.14
A26: U4.16
A27: U4.17
A28: U4.19
A29: R8.2 TP13.1 U4.20 | length 1236.6
  Top Layer w6: U4.20@2232.28,2424.49 2279.49,2424.49 2295,2440 v1(2300,2440) ; v1(2535,1634.17) R8.2@2587.62,1634.17
  Top Layer w15: v1(2300,2440) 2407.46,2440 2435,2412.46 TP13.1@2435,2410
  Bottom Layer w6: v1(2300,2440) 2332,2408 2332,1738.46 2436.29,1634.17 v1(2535,1634.17)
A30: R23.2 TP18.1 U4.22 | length 2286.6
  Top Layer w6: v1(2162.66,2468.24) 2191.08,2468.24 2201.58,2457.73 2228.57,2457.73 2231.3,2455 U4.22@2232.28,2455.98 ; v1(2170,2571.45) 2881.45,2571.45 2915,2605 v1(3270,2605)
  Top Layer w8: R23.2@3291.26,1750 3300,1758.74 v1(3300,1815)
  Top Layer w15: v1(3270,2605) 3272.49,2602.51 3317.46,2602.51 3345,2574.97 TP18.1@3345,2545
  Bottom Layer w6: v1(2162.66,2468.24) 2162.66,2564.11 v1(2170,2571.45) ; v1(3270,2605) 3303.02,2571.98 3303.02,1818.02 v1(3300,1815)
A31: R4.2 U4.23 | length 430.2
  Top Layer w8: U4.23@2232.28,2471.73 2282.26,2471.73 2320.53,2510 2495,2510 2520,2485 R4.2@2636.26,2485
ALE0: R9.1 R17.1 TP16.1 U1.PL2_22 | length 3554.6
  Top Layer w6: v1(1285.94,1580) R9.1@1350.63,1580 ; v1(1290,2235) R17.1@1351.26,2235
  Top Layer w15: TP16.1@1165,2235 v1(1290,2235)
  Bottom Layer w6: U1.PL2_22@800,1973.74 741.26,1973.74 525,2190 525,2885 625,2985 1235,2985 1351.26,2868.74 1351.26,2470.53 1290,2409.27 v1(1290,2235) 1305,2220 1305,1660 1285.94,1640.94 v1(1285.94,1580)
ALE1: R13.1 R24.1 TP22.1 U1.PL2_20 | length 2958.9
  Top Layer w6: v1(1263,1979.26) 1350.52,1979.26 R13.1@1351.26,1980 ; v1(1290,2505) R24.1@1351.26,2505
  Top Layer w10: TP22.1@1150,1985 TP22.1@1155.74,1979.26
  Top Layer w15: TP22.1@1155.74,1979.26 v1(1263,1979.26)
  Bottom Layer w6: U1.PL2_20@800,2052.48 737.52,2052.48 550,2240 550,2865 650,2965 1205,2965 1305,2865 1305,2522.53 1290,2507.53 v1(1290,2505) 1263,2478 v1(1263,1979.26)
ANALOG_IN0: J3.12 R81.2 U8.1 | length 426.8
  Top Layer w10: J3.12@2275,480 2279.92,480 R81.2@2499.92,700 ; R81.2@2495,700 R81.2@2499.92,700 ; U8.1@2605.43,700.83 2500.75,700.83 R81.2@2499.92,700
ANALOG_IN1: J3.11 U8.2 | length 400.1
  Top Layer w10: J3.11@2375,480 2377.5,482.5 2377.5,527.5 2445,595 2570,595 2631.02,656.02 U8.2@2631.02,700.83
ANALOG_IN2: J3.10 U8.3 | length 342.9
  Top Layer w10: J3.10@2475,480 2475,545 2505,575 2585,575 2656.61,646.61 U8.3@2656.61,700.83
ANALOG_IN3: J3.9 U8.4 | length 265.2
  Top Layer w10: J3.9@2575,480 2575,535 2682.2,642.2 U8.4@2682.2,700.83
ANALOG_IN4: J3.8 U8.5 | length 234.4
  Top Layer w10: J3.8@2675,480 2675,600 2707.8,632.8 U8.5@2707.8,700.83
ANALOG_IN5: J3.7 U8.6 | length 238.1
  Top Layer w10: U8.6@2733.39,700.83 2733.39,611.61 2775,570 J3.7@2775,480
ANALOG_IN6: J3.6 U8.7 | length 268.9
  Top Layer w10: U8.7@2758.98,700.83 2758.98,636.02 2875,520 J3.6@2875,480
ANALOG_IN7: J3.5 U8.8 | length 311.4
  Top Layer w10: U8.8@2784.57,700.83 2784.57,650.43 2805,630 2825,630 J3.5@2975,480
B\H\E\: R6.2 R31.2 TP24.1 | length 3093.2
  Top Layer w6: R6.2@2889.37,2985 2889.37,2989.92 2994.45,3095 v1(4000,3095) ; v1(3930,1405) R31.2@3930,1491.26
  Top Layer w15: v1(3930,1405) 4012.46,1405 4040,1377.46 TP24.1@4040,1370
  Bottom Layer w6: v1(3930,1405) 3930,1680 4000,1750 v1(4000,3095)
COM: J3.15 R80.1 U8.11 | length 1131.6
  Top Layer w10: J3.15@1975,480 1975,530 2220,775 2690,775 2733.39,818.39 U8.11@2733.39,929.17 2733.39,958.7 2735,960.31 2735,999.37 R80.1@2750.63,1015
FPGA_GPIO0: J1.7 R44.2 U1.PL3_17 | length 2134.3
  Top Layer w15: J1.7@1000,480 R44.2@1000,635.63
  Bottom Layer w10: U1.PL3_17@209.45,2131.22 500,1840.67 500,980 J1.7@1000,480
FPGA_GPIO1: J1.8 R46.2 U1.PL3_19 | length 2014.1
  Top Layer w15: J1.8@900,480 R46.2@900,635.63
  Bottom Layer w10: U1.PL3_19@209.45,2052.48 465,1796.93 465,915 J1.8@900,480
FPGA_GPIO2: J1.9 R48.2 U1.PL3_21 | length 1894
  Top Layer w15: J1.9@800,480 R48.2@800,635.63
  Bottom Layer w10: U1.PL3_21@209.45,1973.74 430,1753.19 430,850 J1.9@800,480
FPGA_GPIO3: J1.10 R50.2 U1.PL3_23 | length 1773.8
  Top Layer w15: J1.10@700,480 R50.2@700,635.63
  Bottom Layer w10: U1.PL3_23@209.45,1895 400,1704.45 400,780 J1.10@700,480
FPGA_GPIO4: J1.11 R59.2 U1.PL3_25 | length 1653.7
  Top Layer w15: J1.11@600,480 R59.2@600,635.63
  Bottom Layer w10: U1.PL3_25@209.45,1816.26 370,1655.71 370,710 J1.11@600,480
FPGA_GPIO5: J1.12 R64.2 U1.PL3_27 | length 1533.5
  Top Layer w15: J1.12@500,480 R64.2@500,635.63
  Bottom Layer w10: U1.PL3_27@209.45,1737.52 340,1606.97 340,640 J1.12@500,480
FPGA_GPIO6: J1.13 R66.2 U1.PL3_29 | length 1413.3
  Top Layer w15: J1.13@400,480 R66.2@400,635.63
  Bottom Layer w10: U1.PL3_29@209.45,1658.78 315,1553.23 315,565 J1.13@400,480
FPGA_GPIO7: J1.14 R68.2 U1.PL3_31 | length 1293.2
  Top Layer w15: J1.14@300,480 R68.2@300,635.63
  Bottom Layer w10: U1.PL3_31@209.45,1580.04 285,1504.49 285,495 J1.14@300,480
FPGA_GPIO8: J1.15 R70.2 U1.PL3_33 | length 1222.7
  Top Layer w15: J1.15@200,480 R70.2@200,635.63
  Bottom Layer w10: J1.15@200,480 260,540 260,1450.75 U1.PL3_33@209.45,1501.3
FPGA_GPIO9: C13.2 J1.16 SW3.1 SW3.2 U1.PL3_35 | length 2504.9
  Top Layer w15: J1.16@88.04,468.04 J1.16@100,480 C13.2@100,640 ; v1@106.42,1003.58 SW3.1@1133.5,1003.58 SW3.2@1446.5,1003.58
  Bottom Layer w10: J1.16@100,480 108.67,488.67 v1(108.67,1003.67) 209.45,1104.45 U1.PL3_35@209.45,1422.56